# Altium PCB mini_backplane.PcbDoc (part 5 of 5)
Units mm, origin at the board's own origin, x right, y up, seen from the top; angles counter-clockwise.
Board outline 232.03 x 195 mm, 4 copper layers (Top Layer, GND, POWER, Bottom Layer); 241 components, 200 nets, 1637 pads, 676 vias.
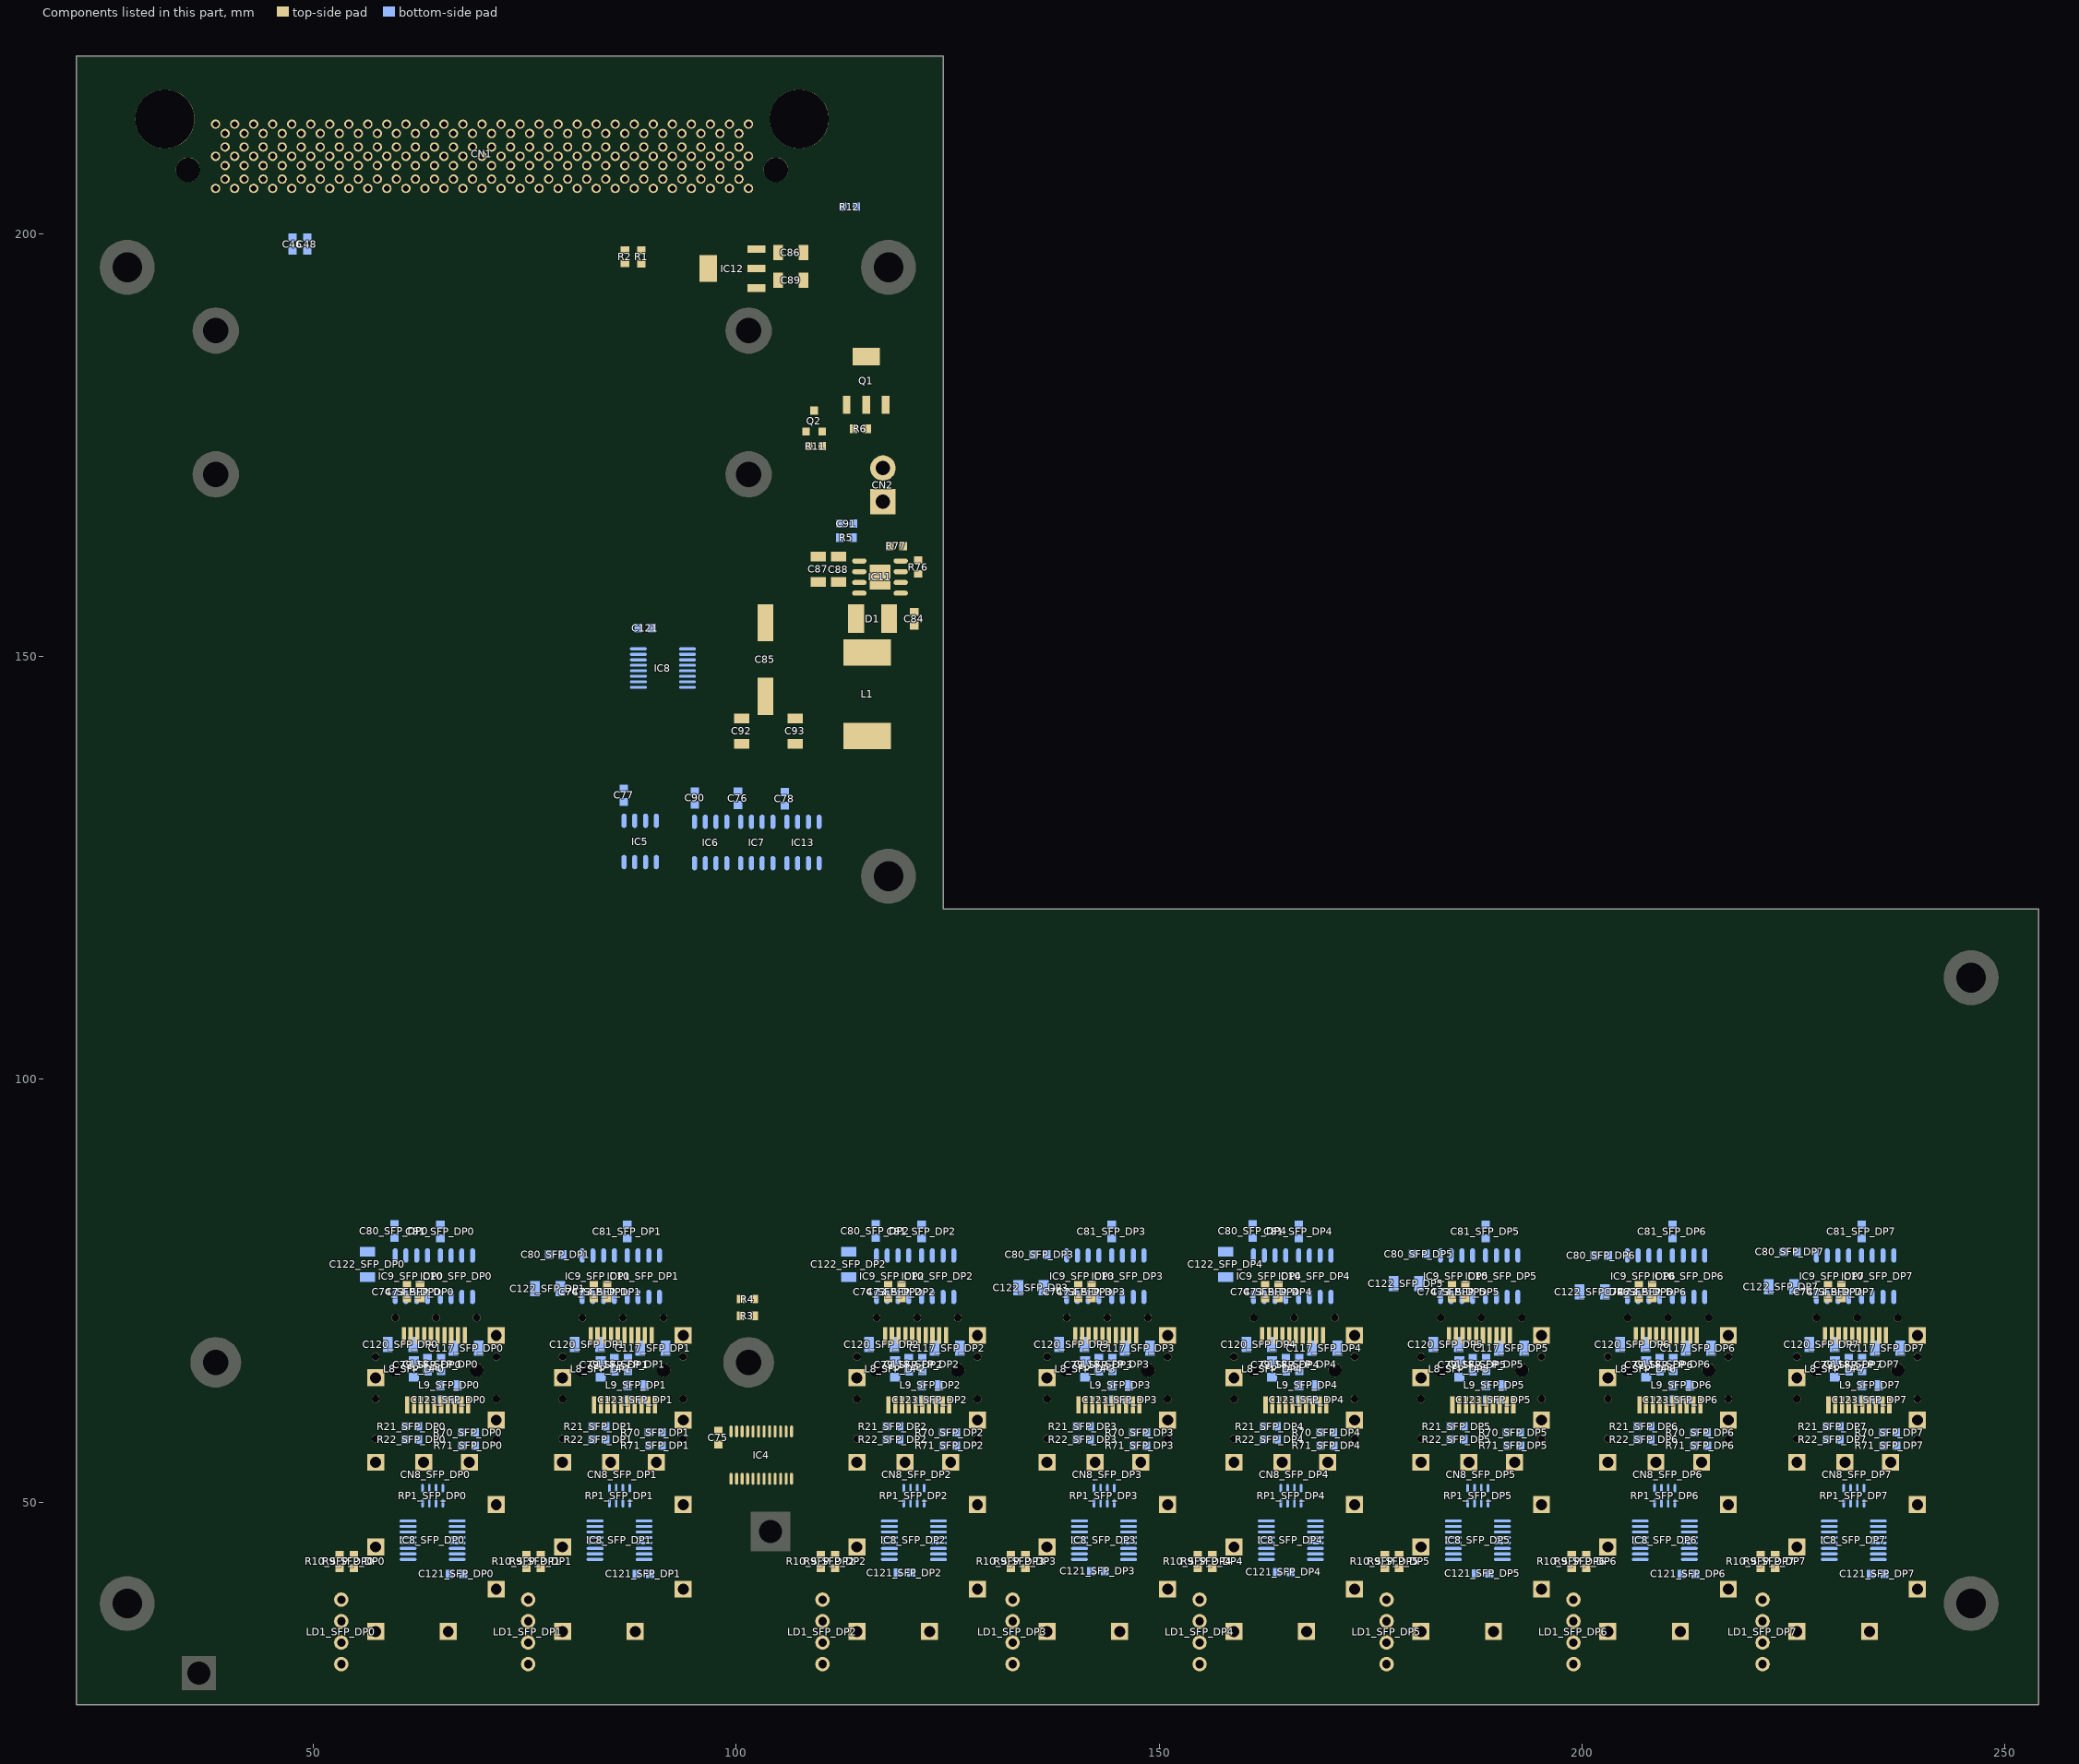
[diagram p7: the components of this part, seen from the top]

## Polygon pours and split planes (outlines as drawn) (continued)
+12V_PSU on POWER (split plane): 104.773,186.436 104.782,186.386 104.81,186.344 108.417,182.738 108.459,182.71 108.509,182.7 123.95,182.7 123.95,156.129 108.554,156.129 105.629,159.054 105.629,177.202 105.62,177.252 105.592,177.294 101.641,181.244 101.599,181.272 101.549,181.282 97.59,181.282 94.897,183.975 94.897,187.83 98.974,191.907 99.002,191.949 99.012,191.999 99.012,198.371 100.663,200.023 104.773,200.023
+3V3 on POWER (split plane): 251.871,50.129 249.129,50.129 249.129,52.871 251.871,52.871

## Other copper
Top Layer:
  text "1" at 251.3,45.3 h1.52 r90
Bottom Layer:
  text "4" at 251.3,54.3 h1.52 r90
GND (plane layer: these items are gaps in the copper):
  lines w0.254: 97.358,137.871 97.358,164.16 100.457,167.259 108.636,167.259 116.027,174.65 124.689,174.65 ; 108.839,136.322 109.042,136.119 124.638,136.119 ; 249,47 252,47 ; 249,47 249,50 252,50 252,47 ; 249,47 252,47
  text "2" at 251.3,48.3 h1.52 r90
POWER (plane layer: these items are gaps in the copper):
  lines w0.254: 22.098,203.149 37.008,203.149 42.977,209.118 50.673,209.118 51.74,210.185 51.74,212.496 52.324,213.081 55.677,213.081 56.566,212.192 56.566,209.982 57.328,209.22 58.09,209.22 59.004,210.134 59.004,212.166 59.842,213.004 66.878,213.004 67.691,212.192 67.691,209.677 68.377,208.991 98.882,208.991 104.902,202.971 104.902,186.436 108.509,182.829 124.536,182.829 ; 104.851,200.152 100.609,200.152 98.882,198.425 98.882,191.999 94.767,187.884 94.767,183.921 97.536,181.153 101.549,181.153 105.5,177.202 105.5,159 108.5,156 124.5,156 ; 249,50 252,50 ; 249,50 252,50 ; 249,50 249,53 252,53 252,50 ; 249,50 252,50
  text "3" at 251.3,51.3 h1.52 r90

## Silkscreen, mask and mechanical layers (free items; w line width, h text height)
Top Overlay:
  drawing of 475 lines, arcs and shapes, not listed
  text "WhiteRabbit" at 181.998,111.42 h4.32
  text "Switch MCH Mini-Backplane" at 169.342,108.585 h4.32
  text "T. W. 2010" at 184.214,105.812 h3.81
  text "rev 1.0" at 186.461,102.972 h3.81
Mechanical 1:
  lines w0.3: 21.971,26.01 254,26.01 254,120.142 124.46,120.142 124.46,221.005 22.301,221.005 21.996,221.005 21.971,220.98 21.971,26.01
Mechanical 15:
  lines w0.008: 34.319,25.923 40.908,25.923 40.908,37.633 58.008,37.633 58.008,25.918 101.518,25.918
  lines w0.01: 33.218,48.521 33.218,192.621 ; 33.218,192.571 cw(c33.718,192.571) 33.718,193.071 ; 33.668,193.071 36.468,193.071 ccw(c36.468,194.071) 37.468,194.071 37.468,197.25 ; 34.318,25.921 34.318,40.271 ; 37.468,196.971 37.468,206.021 cw(c37.968,206.021) 37.968,206.521 101.968,206.521 cw(c101.968,206.021) 102.468,206.021 102.468,196.971 102.468,194.087 ; 69.968,202.021 69.968,206.021 ; 69.968,205.821 69.968,206.521 ; 101.518,25.921 101.518,31.921 105.718,31.921 ; 102.468,194.119 ccw(c103.491,194.094) 103.492,193.071 106.218,193.071 cw(c106.218,192.571) 106.718,192.571 106.718,39.521
  lines w0.2: 37.973,30.353 250.19,30.353 ; 223.266,76.708 242.062,76.708

## Dimensions
125,221 to 129.5,120.5 on Mechanical 1
21,221 to 20.5,26 on Mechanical 1
124.5,222.5 to 22,222 on Mechanical 1
22,24 to 254,25 on Mechanical 1

## Text inside footprints (layer, text, board x,y; h text height)
CN1: Top Overlay "Front side" at 62.459,202.362 h1.52; Mechanical 15 "Card edge" at 61.852,207.634 h1.52